# Altium PCB ACTIVE_ELECTRODE.PcbDoc
Units mil, origin at the board's own origin, x right, y up, seen from the top; angles counter-clockwise.
Board outline 850 x 850 mil, 2 copper layers (Top Layer, Bottom Layer); 18 components, 11 nets, 58 pads, 20 vias.
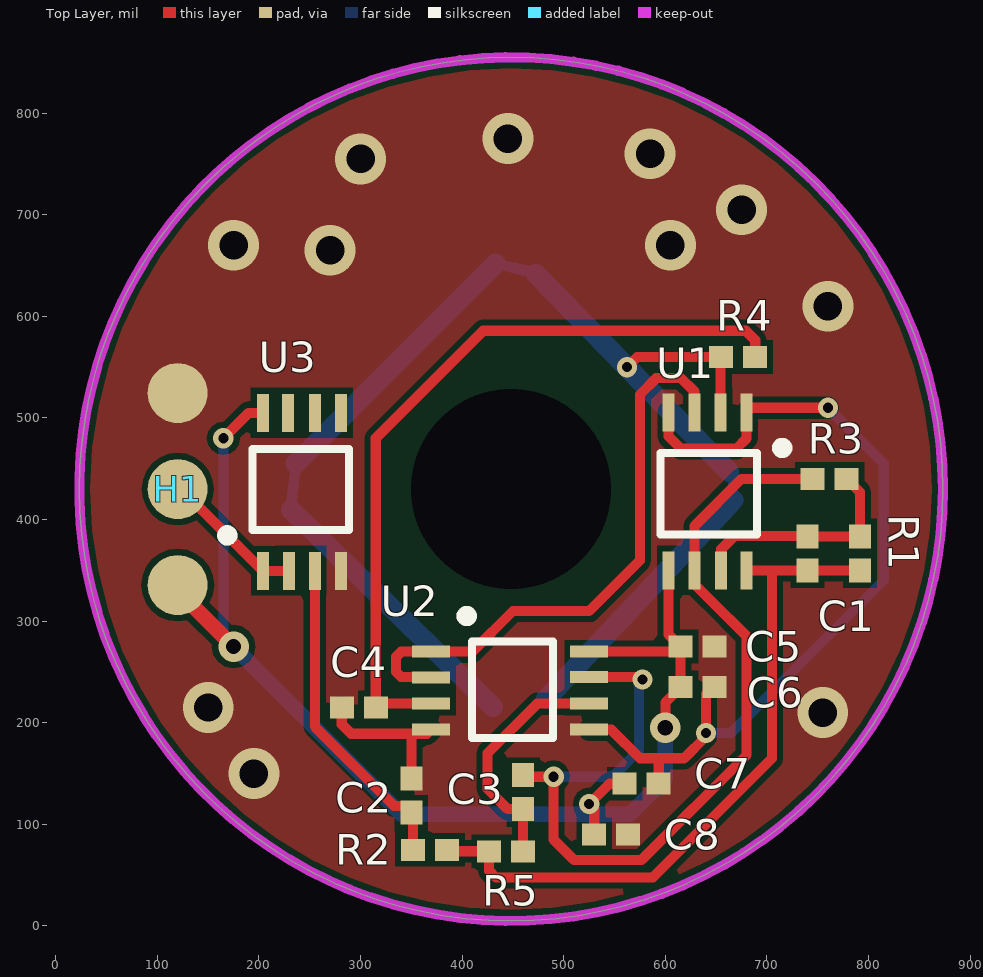
[diagram p0: Top Layer view]
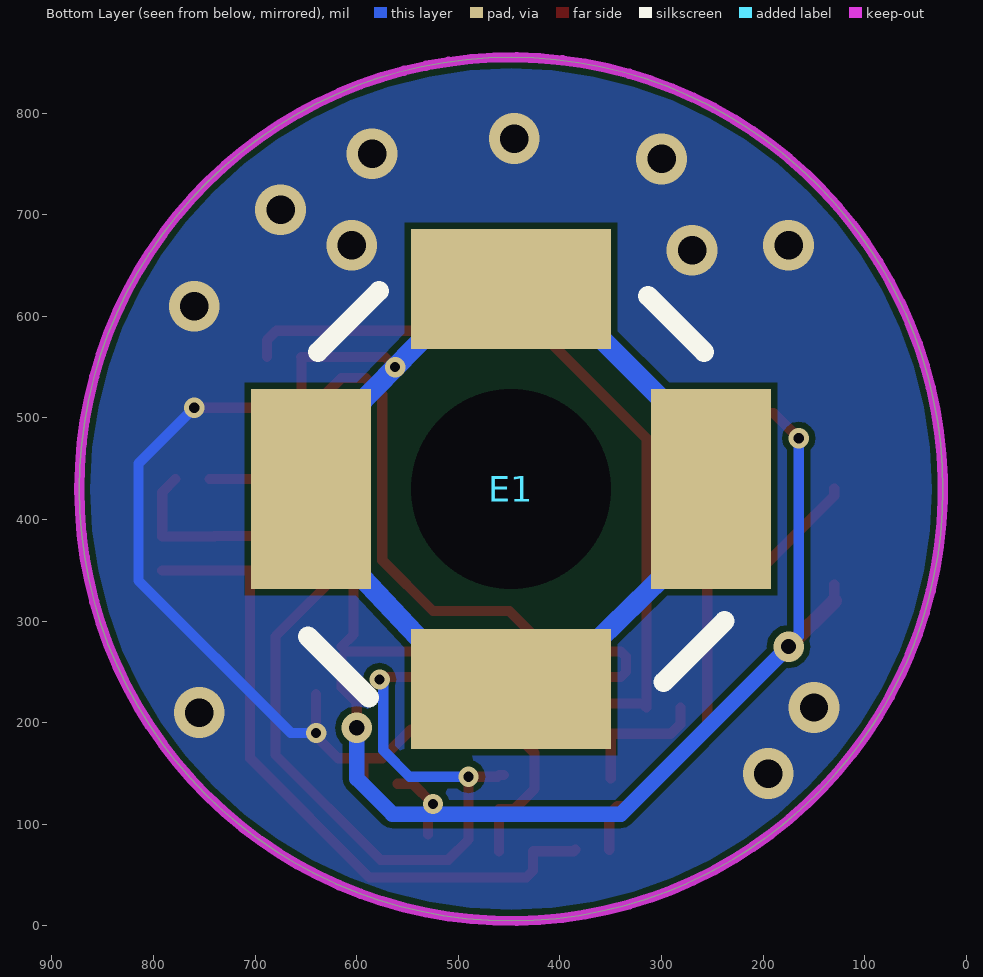
[diagram p1: Bottom Layer view, seen from below]

## Layer stack, top to bottom
Top Solder: solder mask 0.4, Solder Resist, Dk 3.5
Top Layer: signal copper 1.4
Dielectric 1: dielectric 12.6, FR-4, Dk 4.8
Bottom Layer: signal copper 1.4
Bottom Solder: solder mask 0.4, Solder Resist, Dk 3.5

## Board outline
23.15,430 ccw(c448.15,430) 448.15,5 ccw(c448.15,430) 873.15,430 ccw(c448.15,430) 448.15,855 ccw(c448.15,430)

## Design rules (kind name [scope] priority, off if disabled: settings)
Clearance [All] p1: gap=6 ignorepadtopadclearanceinfootprint=TRUE
HoleSize [All] p1: absolutevalues=TRUE maxlimit=200 minlimit=1 maxpercent=80.000 minpercent=20.000
MinimumSolderMaskSliver [All] p1: minsoldermaskwidth=1
PolygonConnect [All] p1: connectstyle=Direct reliefconductorwidth=10 reliefentries=4 polygonreliefangle="90 Angle" airgapwidth=10
RoutingVias [All] p1: holewidth=10 width=20 viastyle="Through Hole" minholewidth=10 minwidth=20 maxholewidth=10 maxwidth=20
SolderMaskExpansion [All] p1: expansion=4
Width [All] p1: maxlimit=50 minlimit=10 preferedwidth=10
28 further rules are at their usual default settings.

## Components (designator, comment, footprint, x,y, rotation, side; value= is the part's Value field where it differs from the comment)
C1 "47pF" 0402[IMP] 740,383.46 r270 top
C2 "22pF" 0402[IMP] 350,145 r270 top
C3 "3.3uF" 0402[IMP] 460,115 r90 top
C4 "40nF" 0402[IMP] 315,215 r180 top
C5 ".1uF" 0402[IMP] 648.46,275 r180 top
C6 "10uF" 0402[IMP] 648.46,235 r180 top
C7 ".1uF" 0402[IMP] 593.46,140 r180 top
C8 "10uF" 0402[IMP] 563.46,90 r180 top
E1 "Electrode_Snap" Electrode_Socket 448.15,430 r180 bottom
H1 "Electrode Header" "Electrode Header" 120,430 r90 top
R1 "1M" 0402[IMP] 791.54,383.46 r270 top
R2 "110k" 0402[IMP] 351.54,75 r0 top
R3 "1K" 0402[IMP] 745,440 r0 top
R4 "2M" 0402[IMP] 688.46,560 r180 top
R5 "2M" 0402[IMP] 460,73.46 r180 top
U1 "AD8237" MSOP-8 680,505.51 r180 top
U2 "AD8607" MSOP-8 369.49,270 r270 top
U3 "AD8602" MSOP-8 203.82,349.49 r0 top

## Footprints (in the part's own frame and the unit in brackets; to place one, negate y for a bottom-side part, rotate by r counter-clockwise, add the part's x,y. Pads: shape width x height; smd on the part's side, far side on the other; paste and mask are expansions set on the pad)
0402[IMP] [mm]
  rect 0.6x0.55 smd: 1(0,0) 2(0.85,0)
"Electrode Header" [mm]
  round 1.5 smd: 1(-2.4,0) 2(0,0) 3(2.4,0)
Electrode_Socket [mm]
  round 2 hole 5 unplated: 0(0,0)
  rect 3x5 smd: 1(-5,0) 1(5,0)
  rect 5x3 smd: 1(0,-5) 1(0,5)
  silkscreen extent -5.08,-5.21 5.33,4.95
MSOP-8 [mm]
  rect 0.3x0.95 smd: 1(0,0) 2(0.65,0) 3(1.3,0) 4(1.95,0) 5(1.95,3.95) 6(1.3,3.95) 7(0.635,3.95) 8(0,3.95)
  silkscreen extent -1.02,0.76 2.16,3.05

## Part data
C1 C2 C3 C4 C5 C6 C7 C8: library part CAPACITOR, Current=CIMAX, MAX_TEMP=CTMAX, PSpiceTemplate="C^@REFDES %1 %2 ?TOLERANCE|C^@REFDES| @VALUE ?IC/IC=@IC/ TC=@TC1,@TC2 ?TOLERANCE|\n.model C^@REFDES CAP C=1 DEV=@TOLERANCE%|", VOLTAGE=CMAX, CLASS=DISCRETE, DIST=FLAT, KNEE=CBMAX, SLOPE=CSMAX, Supplier 1=Digi-Key, TC1=0, TC2=0
  C2 C3 C5 C6 C7 C8: Supplier 2=Digi-Key
R1 R2 R3 R4 R5: library part RESISTOR, Supplier 1=Digi-Key
U1: Supplier Part Number 1=AD8237ARMZ-ND, Supplier 1=Digi-Key
U2: Supplier Part Number 1=AD8607ARMZ-R2CT-ND, Supplier 1=Digi-Key

## Via types
v1: diameter 50, hole 28, Top Layer to Bottom Layer, 11 vias
v2: diameter 20, hole 10, Top Layer to Bottom Layer, 7 vias
v3: diameter 30, hole 15, Top Layer to Bottom Layer, 2 vias

## Nets (pads, with @x,y where several pads share a name; then routed paths per layer and width w, separated by ;. In a path a pad name is that pad's centre, name@x,y a point inside that pad or via, vN(x,y) a via of type N, cw(c..) or ccw(c..) an arc to the next point about the centre after c; other vN are vias at no path point)
GND1: C2.1 C4.2 C5.1 C6.1 C7.1 C8.1 H1.3 U1.1 U1.4 U2.4 U2.5 U3.4 | length 1005.7
  Top Layer w10: C4.2 281.54,198.46 290.83,189.17 350,189.17 ; C2.1 350,189.17 ; U2.4 365.43,189.17 350,189.17 ; U2.5 546.77,193.23 575,165 593.46,165 ; C7.1 593.46,163.46 ; U1.4 603.23,481.77 615,470 670,470 680,480 U1.1 684.49,510 v2(760,510) ; C6.1@640,228.46 v2(640,190) 640,186.54 618.46,165 595,165 ; 593.46,163.46 593.46,165 ; 593.46,163.46 595,165 ; 593.46,165 595,165
  Bottom Layer w10: v2(640,190) 665,190 815,340 815,455 v2(760,510)
  other v1: 195,150 755,210 150,215 760,610 270,665 175,670 605,670 675,705 300,755 585,760 445,775
NetC1_1: C1.1 R1.1 R3.2 U1.7 | length 224.7
  Top Layer w10: U1.7 655,370.82 667.88,383.7 739.76,383.7 C1.1 R1.1 791.54,426.93 R3.2
NetC1_2: C1.2 R1.2 R2.2 R5.2 U1.8 | length 687.7
  Top Layer w10: R2.2 386.54,73.46 R5.2 426.54,54.29 433.19,47.64 587.64,47.64 705,165 705,350 ; U1.8 705,350 ; R1.2 C1.2 705,350
NetC2_2: C2.2 R2.1 U3.3 | length 320.6
  Top Layer w10: U3.3 255,196.15 332.96,118.19 343.35,118.19 C2.2 351.54,110 R2.1
NetC3_1: C3.1 R5.1 U2.6 | length 240
  Top Layer w10: R5.1 C3.1 445,115 425,135 425,170 473.82,218.82 U2.6
NetC3_2: C3.2 R3.1 U1.6 U2.7 | length 940.1
  Top Layer w10: C3.2@455,148.46 C3.2 461.54,146.93 v2(490,146.93) 490,85 510,65 576.66,65 680,168.34 680,285 644.7,320.3 644.54,320.3 628.82,336.02 U1.6 628.82,393.82 675,440 R3.1 ; U2.7 575,245 v2(577.5,242.5)
  Bottom Layer w10: v2(490,146.93) 548.07,146.93 574,172.86 574,239 v2(577.5,242.5)
NetC4_1: C4.1 R4.1 U2.3 | length 758.8
  Top Layer w10: U2.3 318.82,218.82 C4.1 315,480 420.83,585.83 679.17,585.83 688.46,576.54 R4.1
NetE1_1: E1.1 R4.2 U1.2 | length 1408.3
  Top Layer w10: v2(562.24,550) 572.24,560 R4.2 ; U1.2 R4.2@654.41,559.41
  Bottom Layer w10: E1.1@231.53,409.77 231.3,410 233.74,431.95 E1.1@236.3,455 ; E1.1@466.3,645 452.49,647.85 433.15,651.85 453.27,646.64 E1.1@472.96,641.54 ; E1.1@662.5,412.5 E1.1@670,420 ; E1.1@662.57,447.14 667.27,442.32 666.1,428.25 E1.1@666.83,419.22
  Bottom Layer w20: E1.1@231.53,409.77 E1.1@430.42,215.47 ; E1.1@236.3,455 E1.1@433.15,651.85 ; E1.1@472.96,641.54 v2(562.24,550) E1.1@662.57,447.14 ; E1.1@482.91,223.72 661.96,414.05 E1.1@666.83,419.22
NetH1_2: H1.2 U3.1 U3.2 | length 137.2
  Top Layer w10: H1.2@130,430.51 130,423.31 U3.1 U3.2
NetU1_3: U1.3 U2.1 U2.2 | length 580.6
  Top Layer w10: U2.2 368.9,245 340,245 335,250 335,265 340,270 U2.1 410,270 450,310 525,310 575,360 575,523.1 591.11,539.21 615.35,539.21 628.82,525.74 U1.3
VCC1: C5.2 C6.2 C7.2 C8.2 H1.1 U1.5 U2.8 U3.8 | length 1231.3
  Top Layer w10: H1.1@130,320 H1.1@130,336.02 ; v2(165,480) 190,505 U3.8 ; U2.8 610,270 C5.2 603.23,286.77 U1.5 ; C8.2 530,115 v2(525,120) 545,140 C7.2 ; v3(600,195) 600,220 C6.2 C5.2@615,264.92
  Top Layer w15: H1.1@130,320 v3(175,275)
  Bottom Layer w10: v2(165,480) 165,285 v3(175,275) ; v2(525,120) 525,115 530,110
  Bottom Layer w15: v3(175,275) 340,110 530,110 565,110 600,145 v3(600,195)
pads on no net: E1.0 U3.5 U3.6 U3.7

## Polygon pours and split planes (outlines as drawn)
GND1 on Top Layer "GND1_L01_P000" (solid, remove dead copper, pour order 0): 751.47,-40.55 165,30 65,105 -60,230 10,665 245,880 670,860 850,665 945,405
GND1 on Bottom Layer "GND1_L02_P002" (solid, remove dead copper, pour order 2): 885,-65 880,-60 25,-60 25,855 45,875 60,860 900,860 900,820 910,810

## Keep-outs
Keep-Out Layer:
  circle w10: c448.15,430 r425